# Altium PCB Patch.PcbDoc
Units mil, origin at the board's own origin, x right, y up, seen from the top; angles counter-clockwise.
Board outline 5118.11 x 5118.11 mil, 2 copper layers (Top Layer, Bottom Layer); 22 components, 7 nets, 67 pads, 5 vias.
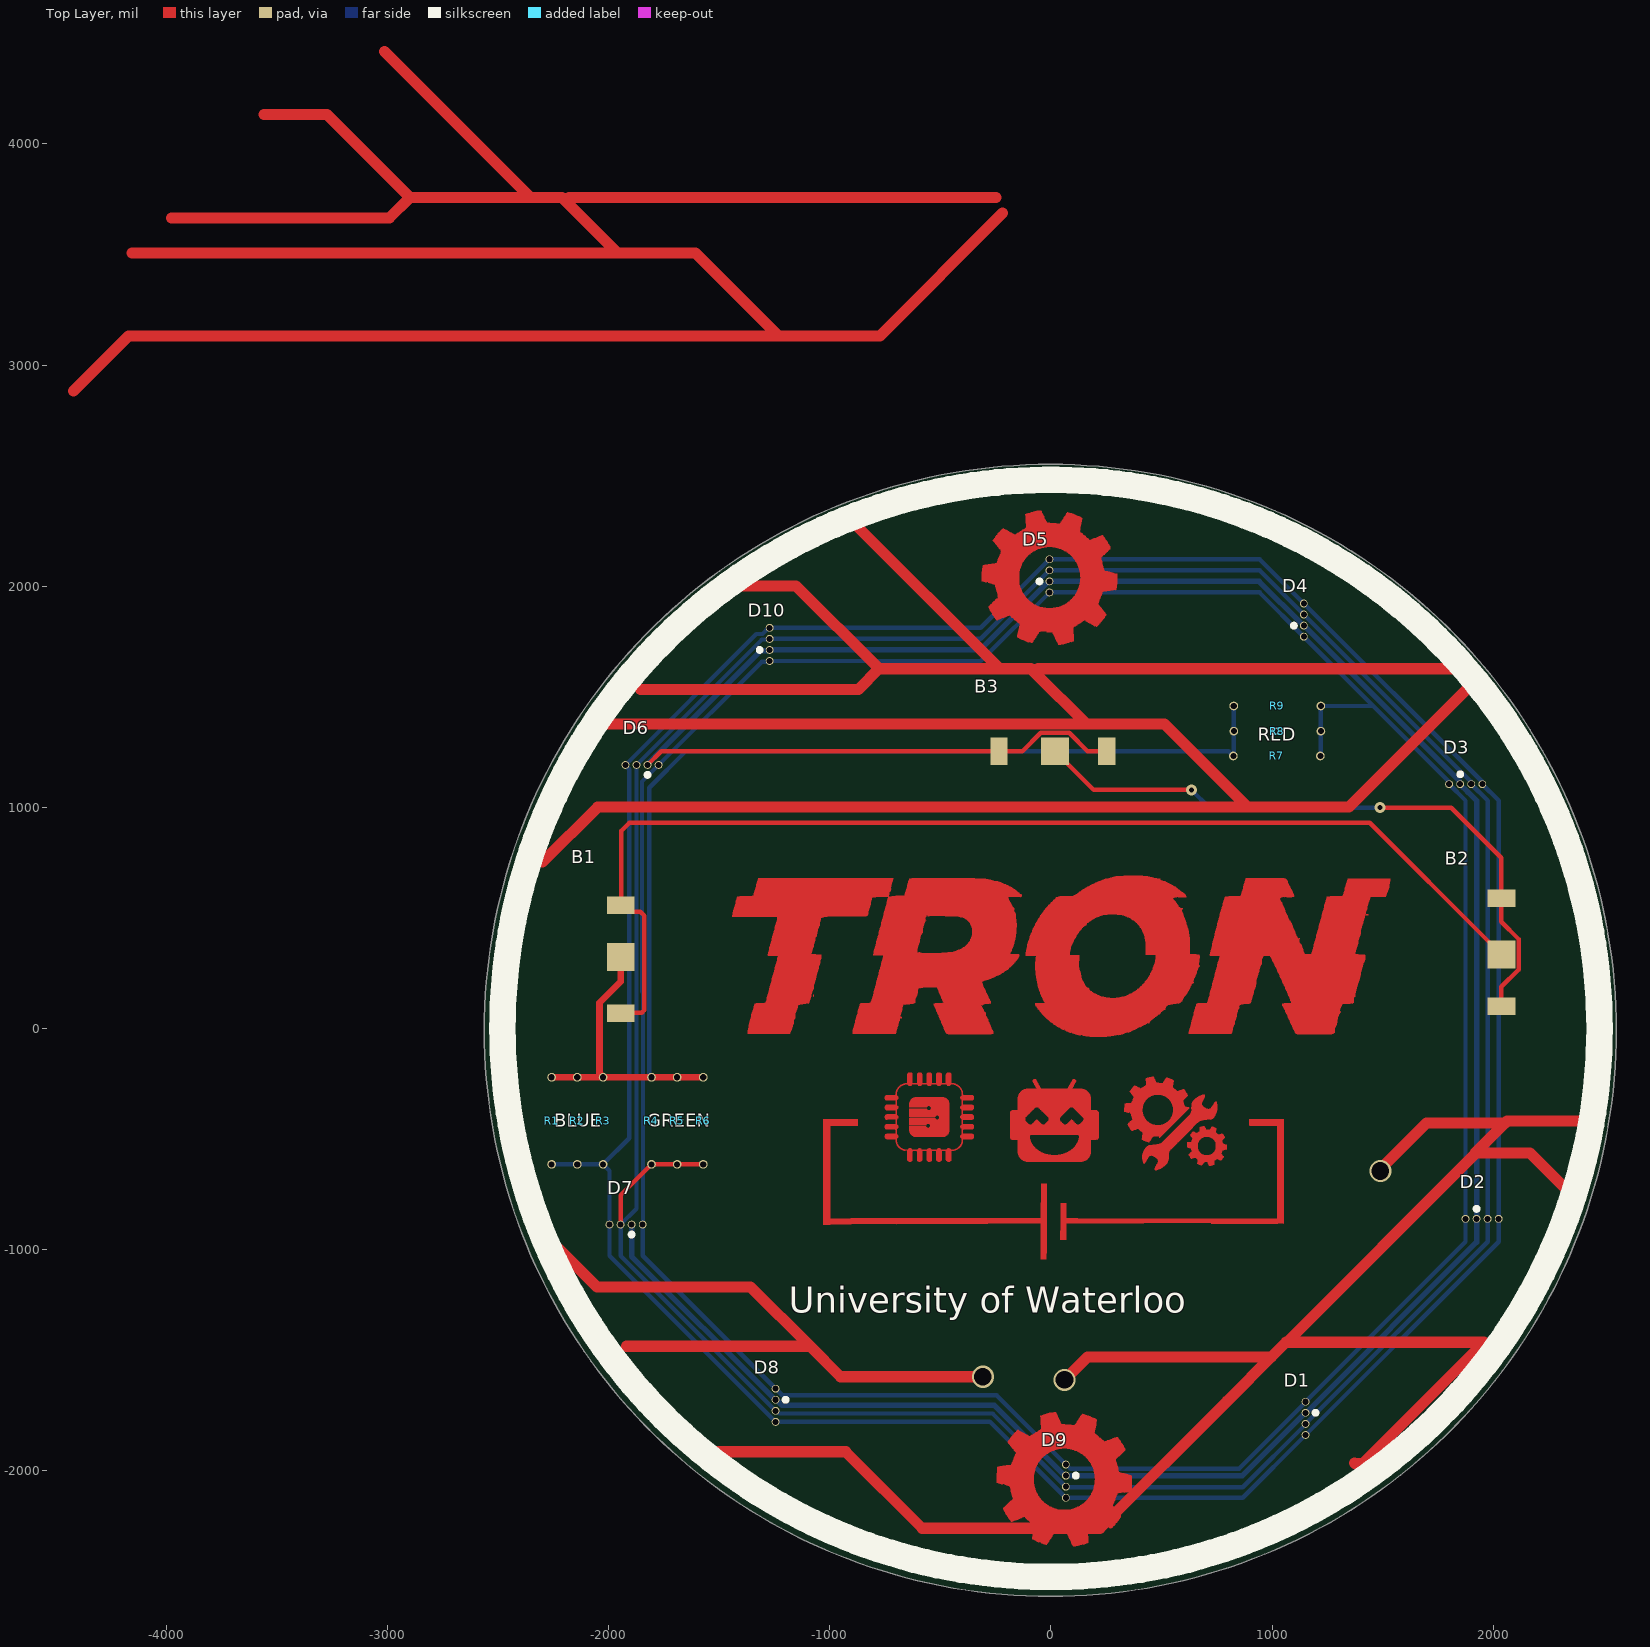
[diagram p0: Top Layer view]
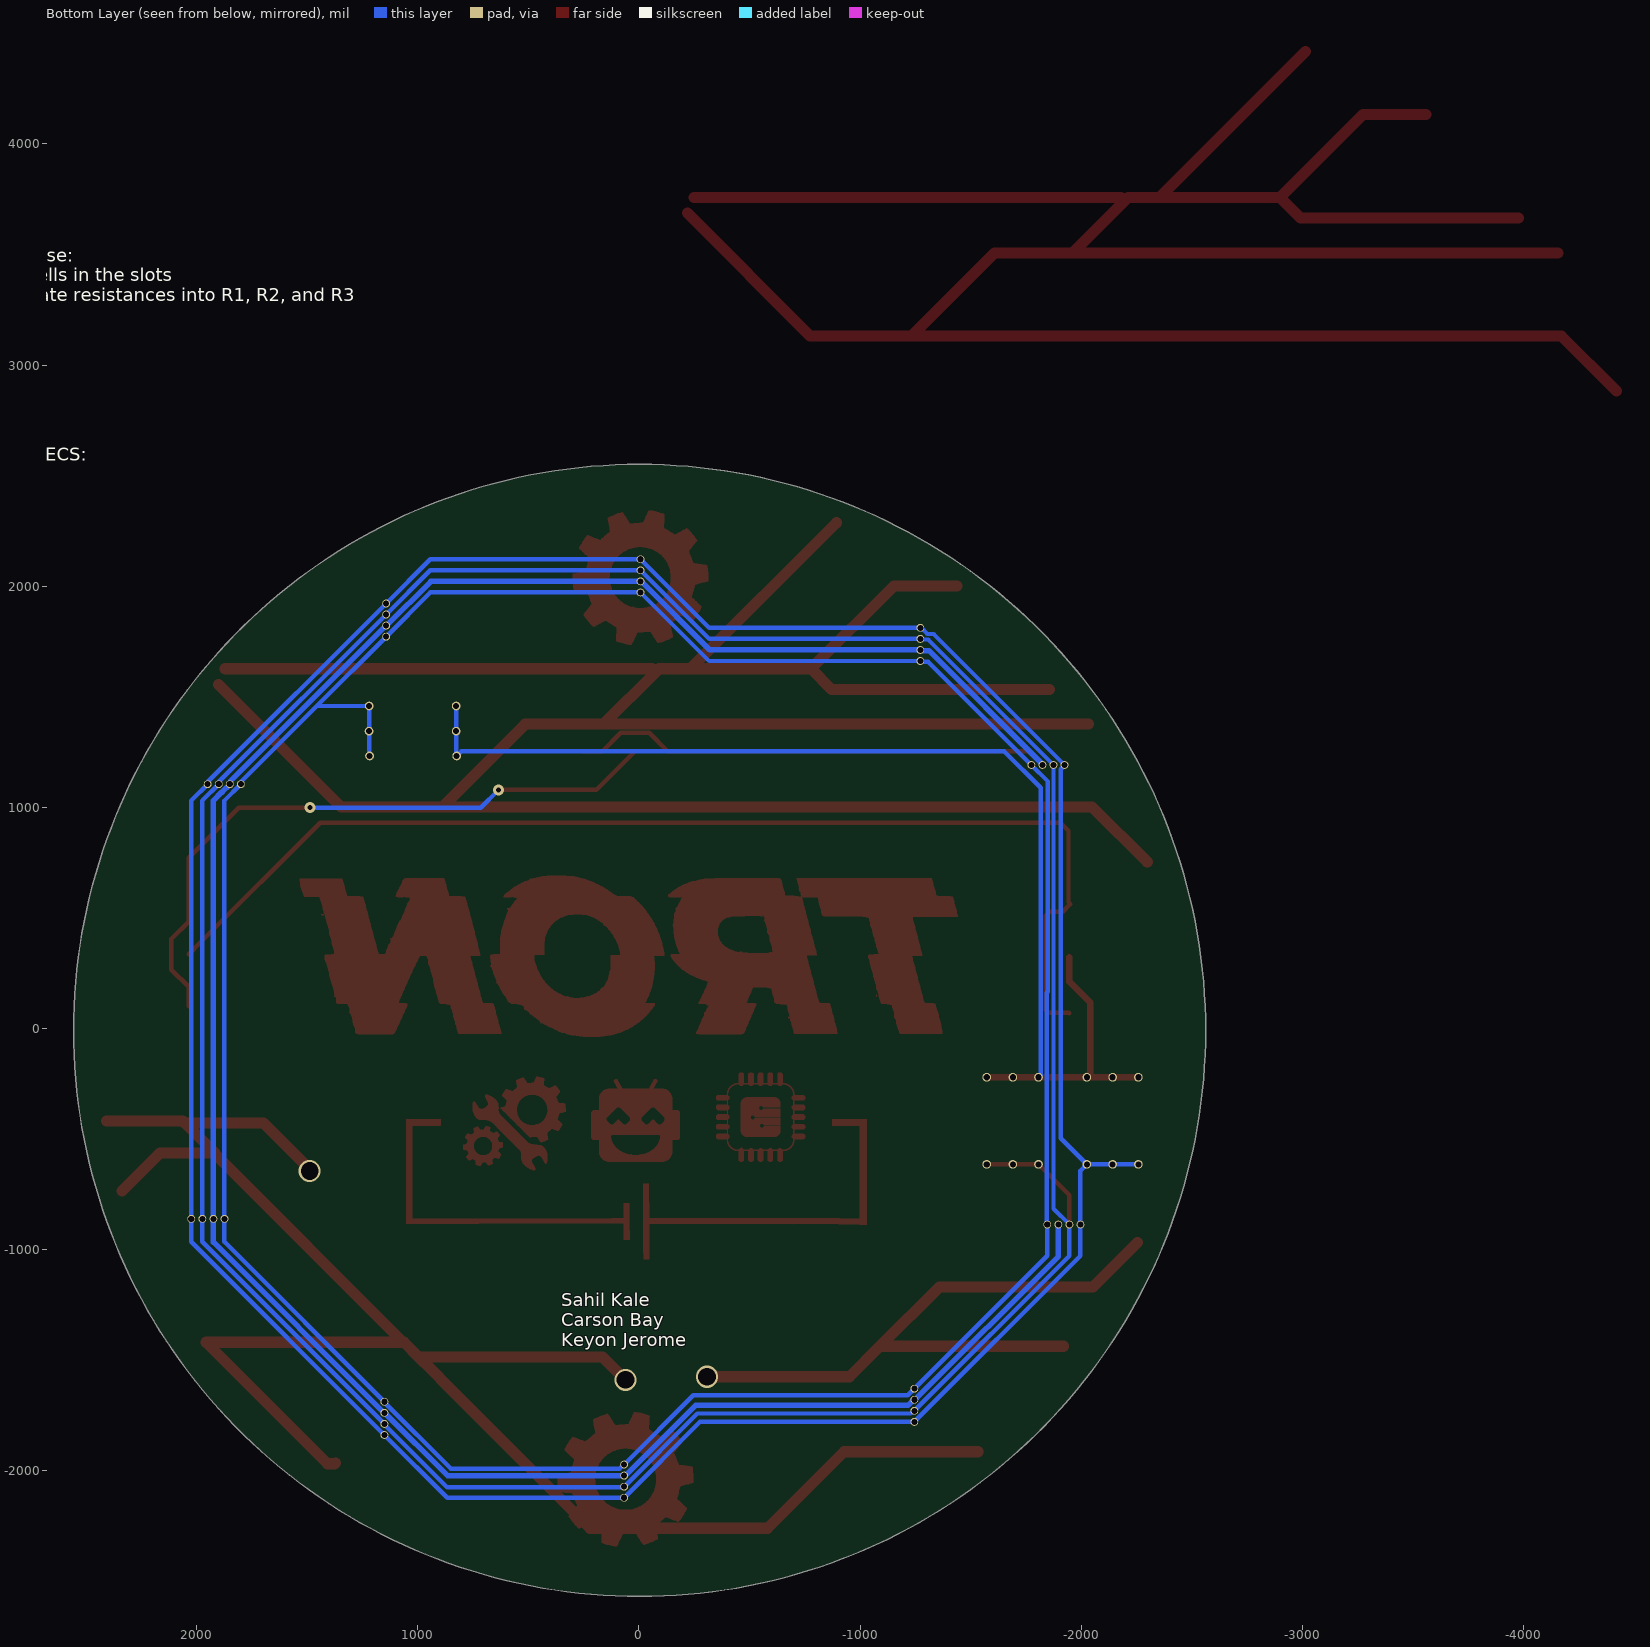
[diagram p1: Bottom Layer view, seen from below]
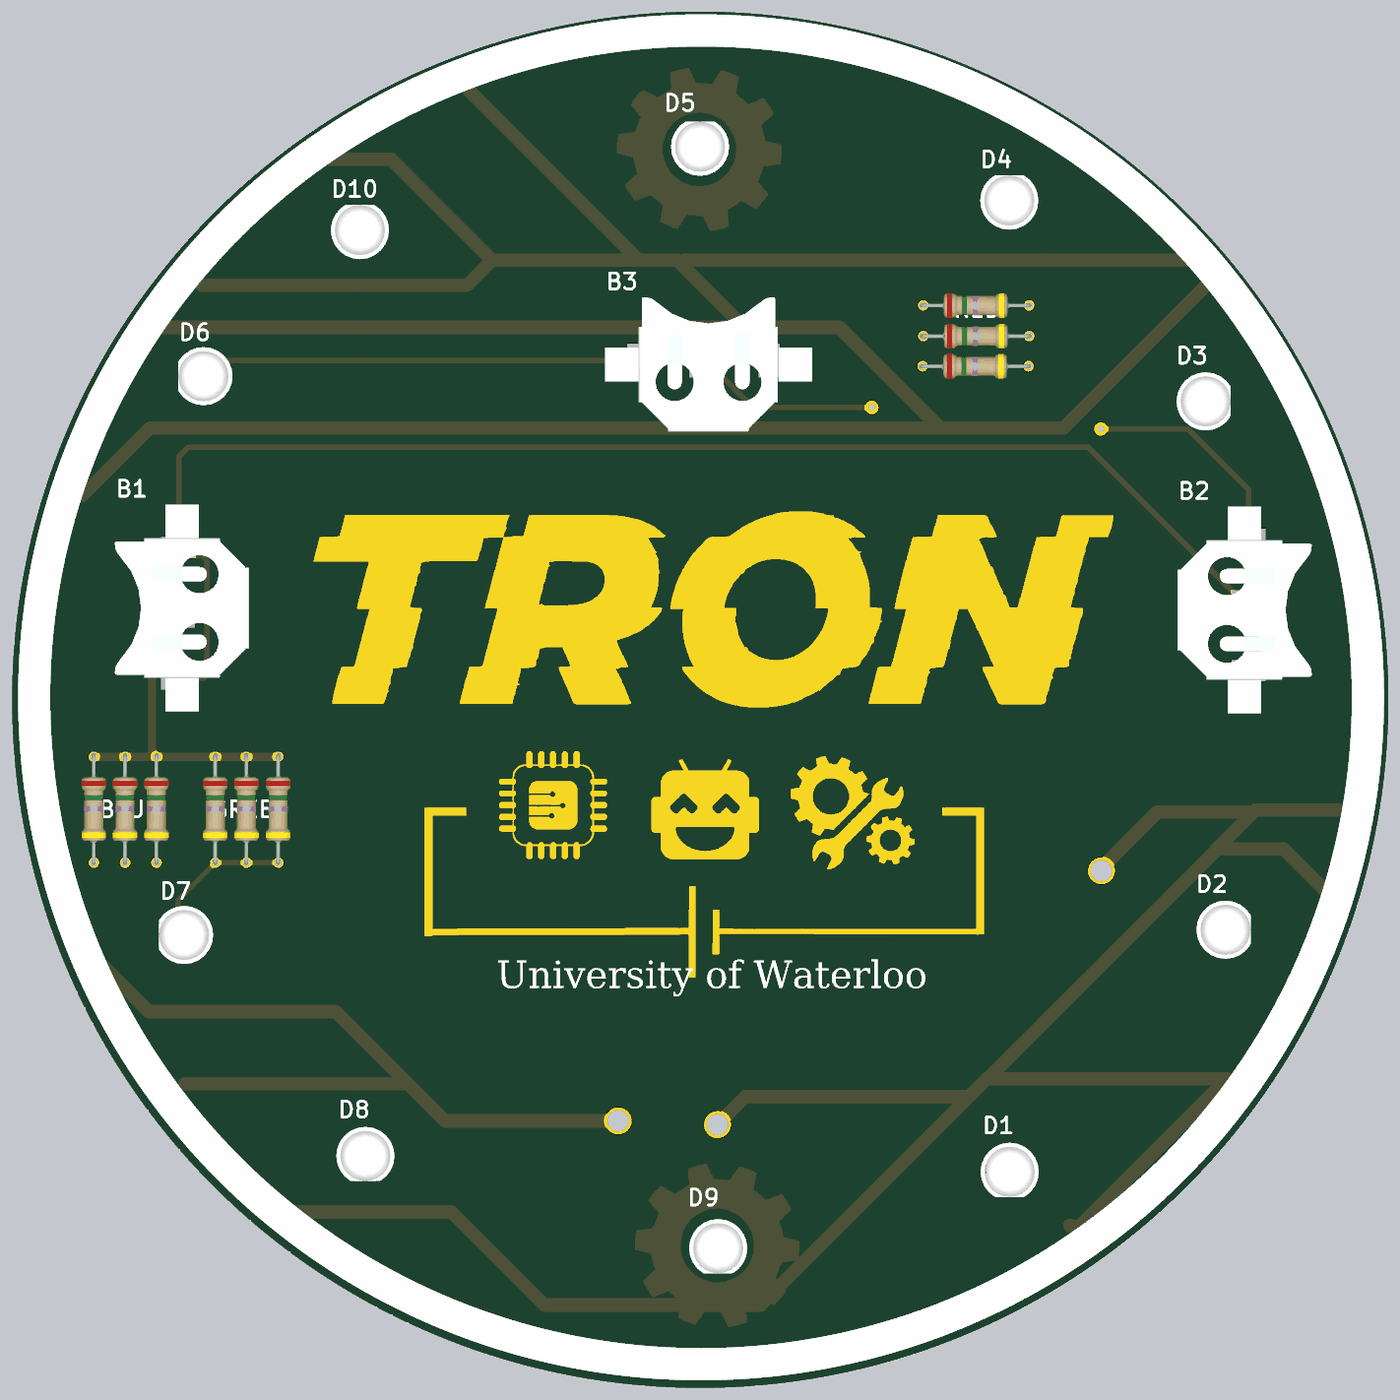
[diagram p2: 3D render of the assembled board from above, using the file's embedded part models]

## Layer stack, top to bottom
Top Solder: solder mask 0.4, Solder Resist, Dk 3.5
Top Layer: signal copper 1.4
Dielectric 1: dielectric 12.6, FR-4, Dk 4.8
Bottom Layer: signal copper 1.4
Bottom Solder: solder mask 0.4, Solder Resist, Dk 3.5

## Board outline
-2562.06,-8 ccw(c-3,-8) -3,-2567.06 ccw(c-3,-8) 2556.06,-8 ccw(c-3,-8) -3,2551.06 ccw(c-3,-8)

## Design rules (kind name [scope] priority, off if disabled: settings)
BoardOutlineClearance [All] p1: gap=7.87 ignorepadtopadclearanceinfootprint=FALSE
Clearance [All] p1: gap=5 ignorepadtopadclearanceinfootprint=FALSE except(9.84: Arc-Hole Track-Hole SMDPad-Hole THPad-Hole Via-Hole Fill-Hole Poly-Hole Region-Hole Text-Hole)
ComponentClearance [All] p1: gap=5 collisioncheckmode=3 verticalgap=5 showdistances=TRUE
DiffPairsRouting [All] p1: maxlimit=10 minlimit=5 mostfreqgap=5 toplayer_minwidth=5 toplayer_maxwidth=1000 toplayer_prefwidth=5 bottomlayer_minwidth=5 bottomlayer_maxwidth=1000 bottomlayer_prefwidth=5 maxuncoupledlength=500
Height [All] p1: minheight=0 maxheight=71497.94 prefheight=500
HoleSize [All] p1: absolutevalues=TRUE maxlimit=248.03 minlimit=11.81 maxpercent=80.000 minpercent=20.000
HoleToHoleClearance [All] p1: gap=9.84 allowstackedmicrovias=FALSE
MinimumAnnularRing [All] p1: minimumring=3
MinimumSolderMaskSliver [All] p1: minsoldermaskwidth=0
PlaneClearance [All] p1: clearance=5
PlaneConnect PlaneConnectPowerPads [InPadClass('PowerPads')] p1: planeconnectstyle=Direct reliefexpansion=20 reliefentries=4 reliefconductorwidth=10 reliefairgap=10
PlaneConnect [All] p2: pad.planeconnectstyle=Relief pad.reliefexpansion=11.81 pad.reliefentries=4 pad.reliefconductorwidth=5 pad.reliefairgap=5 via.planeconnectstyle=Direct via.reliefexpansion=11.81 via.reliefentries=4 via.reliefconductorwidth=5 via.reliefairgap=5
PolygonConnect PolygonConnectPowerPads [All vs (InPadClass('PowerPads'))] p1: connectstyle=Direct reliefconductorwidth=10 reliefentries=4 polygonreliefangle="90 Angle" airgapwidth=10
PolygonConnect [All] p2: thpad.connectstyle=Relief thpad.reliefconductorwidth=5 thpad.reliefentries=4 thpad.polygonreliefangle="90 Angle" thpad.airgapwidth=5 smdpad.connectstyle=Relief smdpad.reliefconductorwidth=5 smdpad.reliefentries=4 smdpad.polygonreliefangle="90 Angle" smdpad.airgapwidth=5 via.connectstyle=Direct via.reliefconductorwidth=5 via.reliefentries=4 via.polygonreliefangle="90 Angle" via.airgapwidth=5
RoutingVias [All] p1: holewidth=11.81 width=23.62 viastyle="Through Hole" minholewidth=11.81 minwidth=23.62 maxholewidth=23.62 maxwidth=259.84
SilkToSilkClearance [All] p1: silktosilkclearance=0
SilkToSolderMaskClearance [IsPad] p1: minsilkscreentomaskgap=5 clearancetoexposedcopper=TRUE
SolderMaskExpansion [All] p1: expansion=2.95 istentingtop=FALSE
Width [All] p1: maxlimit=1000 minlimit=5 preferedwidth=5 minimp=50.000000 maximp=50.000000 favimp=50.000000
20 further rules are at their usual default settings.

## Classes and differential pairs
component class Main: B1 B2 B3 D1 D2 D3 D4 D5 D6 D7 D8 D9 D10 R1 R4 R5 R6 R7 R8 R9

## Components (designator, comment, footprint, x,y, rotation, side; value= is the part's Value field where it differs from the comment)
B1 "7.9mm BAT" 2988 -1945,558 r270 top
B2 "7.9mm BAT" 2988 2036,100.81 r90 top
B3 "7.9mm BAT" 2988 253,1254 r180 top
D1 "Tri Colour RGB LED" RGB_LED_THRUHOLE 1151,-1687 r270 top
D2 "Tri Colour RGB LED" RGB_LED_THRUHOLE 1874,-860 r0 top
D3 "Tri Colour RGB LED" RGB_LED_THRUHOLE 1800,1105 r0 top
D4 "Tri Colour RGB LED" RGB_LED_THRUHOLE 1143,1772 r90 top
D5 "Tri Colour RGB LED" RGB_LED_THRUHOLE -7,1972 r90 top
D6 "Tri Colour RGB LED" RGB_LED_THRUHOLE -1774,1192 r180 top
D7 "Tri Colour RGB LED" RGB_LED_THRUHOLE -1846,-886 r180 top
D8 "Tri Colour RGB LED" RGB_LED_THRUHOLE -1245,-1628 r270 top
D9 "Tri Colour RGB LED" RGB_LED_THRUHOLE 67,-1971 r270 top
D10 "Tri Colour RGB LED" RGB_LED_THRUHOLE -1272,1662 r90 top
R1 "?Ω" "Generic ThroughHole" -2257.74,-220 r270 top
R2 "?Ω" "Generic ThroughHole" -2141.74,-220 r270 top
R3 "?Ω" "Generic ThroughHole" -2025,-220 r270 top
R4 "?Ω" "Generic ThroughHole" -1806.17,-220 r270 top
R5 "?Ω" "Generic ThroughHole" -1690.17,-220 r270 top
R6 "?Ω" "Generic ThroughHole" -1572.17,-220 r270 top
R7 "?Ω" "Generic ThroughHole" 824.28,1232.65 r0 top
R8 "?Ω" "Generic ThroughHole" 826.58,1344.65 r0 top
R9 "?Ω" "Generic ThroughHole" 826.28,1458.65 r0 top

## Footprints (in the part's own frame and the unit in brackets; to place one, negate y for a bottom-side part, rotate by r counter-clockwise, add the part's x,y. Pads: shape width x height; smd on the part's side, far side on the other; paste and mask are expansions set on the pad)
2988 [mm]
  rect 2x3.2 smd: 1(0,0) 1(12.4,0)
  rect 3.2x3.2 smd: 2(5.969,0)
  body extent -4.06,-5.97 15.49,6.73, height 3.17
"Generic ThroughHole" [mm]
  round 1 hole 0.7: 1(0,0) 2(10,0)
  body extent -0.3,-1.17 10.21,1.14, height 2.51
RGB_LED_THRUHOLE [mm]
  round 0.9 hole 0.7: 1(0,0) 2(2.54,0) 3(3.81,0) 4(1.27,0)
  silkscreen extent 1.07,0.94 1.47,1.34, body extent -0.81,-2.83 4.32,2.67, height 11.6

## Part data
B1 B2 B3: library part "CCELL HOLDER 7.9MM", "KEYSTONE         2988            BATTERY CONTACT, 7.9MM HEAR AID CELL, SURFACE MT", Manufacturer="Keystone Electronics", Manufacturer Part Number=2988, Supplier Part Number 1=36-2988-ND, Category="Batteries and Accessories", ComponentLink1Description=https://datasheet.ciiva.com/4642/m60p6-29374-4642672.pdf?src-supplier=Mouser, ComponentLink1URL=https://datasheet.ciiva.com/4642/m60p6-29374-4642672.pdf?src-supplier=Mouser, ComponentLink2Description=https://datasheet.ciiva.com/4/2988-4524.pdf?src-supplier=Digi-Key, ComponentLink2URL=https://datasheet.ciiva.com/4/2988-4524.pdf?src-supplier=Digi-Key, ComponentLink3Description=https://datasheet.ciiva.com/1390/1726104-1390366.pdf?src-supplier=Element14, ComponentLink3URL=https://datasheet.ciiva.com/1390/1726104-1390366.pdf?src-supplier=Element14, Pricing 1="1=0.39000, 25=0.35440, 100=0.34690, 250=0.32528, 500=0.28920 (USD)", RoHS=Yes, Stock 1=1523, Supplier 1=Digi-Key
D1 D2 D3 D4 D5 D6 D7 D8 D9 D10: library part LED_RGB_THRUHOLE, Supplier Link=https://www.amazon.com/Tricolor-Multicolor-Lighting-Electronics-Components/dp/B01C19ENDM
R1 R2 R3 R4 R5 R6 R7 R8 R9: library part "GENERIC - RES", "Generic Through Hole Resistor"

## Via types
v1: diameter 100, hole 80, Top Layer to Bottom Layer, 3 vias
v2: diameter 50, hole 23.62, Top Layer to Bottom Layer, 2 vias

## Nets (pads, with @x,y where several pads share a name; then routed paths per layer and width w, separated by ;. In a path a pad name is that pad's centre, name@x,y a point inside that pad or via, vN(x,y) a via of type N, cw(c..) or ccw(c..) an arc to the next point about the centre after c; other vN are vias at no path point)
4V5: B1.2 R1.1 R2.1 R3.1 R4.1 R5.1 R6.1 R7.1 R8.1 R9.1 | length 5531.8
  Top Layer w30: R1.1 R2.1 R3.1 ; B1.2 -1945,213 -2041,117 -2041,-201.46 -2025,-217.46 R3.1 ; R6.1 R5.1 R4.1 R3.1
  Bottom Layer w20: R4.1 -1816,-210.17 -1816,1089 -1652,1253 802.88,1253 823.23,1232.65 R7.1 825.43,1233.8 825.43,1343.5 R8.1 826.43,1344.8 826.43,1458.5 R9.1
BLUE: D1.3 D2.3 D3.3 D4.3 D5.3 D6.3 D7.3 D8.3 D9.3 D10.3 R1.2 R2.2 R3.2 | length 14258.1
  Bottom Layer w20: R1.2 R2.2 R3.2 ; R3.2 -1996,-642.7 -1996,-1027 D8.3 -276,-1778 D9.3 867,-2121 D1.3 2024,-964 D2.3 2024,1031 D3.3 1947.05,1107.95 1947.05,1117.95 D4.3 943,2122 D5.3 -317,1812 D10.3 -1276.18,1812 -1304.13,1784.05 -1331.95,1784.05 D6.3 -1924,1189.57 -1907,1172.57 -1907,-495.7 R3.2
GND: B3.1 D1.4 D2.4 D3.4 D4.4 D5.4 D6.4 D7.4 D8.4 D9.4 D10.4 | length 13487.8
  Top Layer w20: D6.4 -1762,1254 -235.19,1254 -129.2,1254 -46.2,1337 82.2,1337 165.2,1254 B3.1@253,1254
  Bottom Layer w25: D7.4 -1896,-1030 -1253.22,-1672.78 -1253.04,-1672.78 -1247.82,-1678 -1240.82,-1678 -1215.82,-1703 -256,-1703 56.78,-2015.78 58.96,-2015.78 64.18,-2021 865.27,-2021 1149.27,-1737 1152.08,-1737 1924,-965.08 D2.4 1924,814.97 1924,1031 1886.12,1068.88 1885.04,1068.88 1850,1103.92 D3.4 ; D6.4 -1824,1194.82 -1818.78,1200.04 -1818.78,1201.37 -1311.1,1709.05 -1306.95,1709.05 -1274.95,1709.05 D10.4 -320,1712 -15.22,2016.78 -15.04,2016.78 -9.82,2022 941,2022 1141,1822 1144.08,1822 1844.78,1121.3 1844.78,1113.04 1848,1109.82 1848,1108.91 D3.4@1847.05,1107.95
GREEN: D1.2 D2.2 D3.2 D4.2 D5.2 D6.2 D7.2 D8.2 D9.2 D10.2 R4.2 R5.2 R6.2 | length 14275.2
  Top Layer w20: D7.2 -1946,-753.53 R4.2 R5.2 R6.2
  Bottom Layer w20: D7.2@-1948.5,-883.5 D7.2 ; D7.2 -1946,-1027 D8.2 -1240.82,-1728 -1228.82,-1740 -264,-1740 69,-2073 867.45,-2073 1151,-1789.45 D1.2 1974,-964 D2.2 1974,1031 D3.2 1897.05,1107.95 1897.05,1117.95 D4.2 943,2072 D5.2 -317,1762 D10.2 -1274.95,1759.05 -1306.95,1759.05 D6.2 -1874,-814 D7.2
NetB1_1: B1.1 B2.2 | length 5247.7
  Top Layer w20: B1.1@-1945,69.81 -1942.81,72 -1849.72,72 -1838,83.72 -1838,510 -1856.63,528.63 -1915.63,528.63 -1950,563 -1942,571 -1942,894.88 -1905.88,931 1440.81,931 1983.01,388.8 B2.2
NetB2_1: B2.1 B3.2 | length 2954
  Top Layer w20: B3.2 193,1079 v2(635,1079) ; v2(1487,999) 1809.98,999 2036,772.98 2036,589 2036,483.01 2113.99,405.02 2113.99,266.61 2036,188.61 B2.1@2036,100.81
  Bottom Layer w20: v2(635,1079) 715,999 v2(1487,999)
RED: D1.1 D2.1 D3.1 D4.1 D5.1 D6.1 D7.1 D8.1 D9.1 D10.1 R7.2 R8.2 R9.2 | length 13622.2
  Bottom Layer w20: R7.2 1219.13,1233.8 1219.13,1343.5 R8.2 1220.13,1344.8 1220.13,1458.5 R9.2 1456.35,1458.65 ; 1456.35,1458.65 1797.05,1117.95 1797.05,1107.95 D3.1 1874,1031 1874,-964 D1.1 1151,-1689.45 851.45,-1989 86.43,-1989 68.43,-1971 D9.1 -246,-1658 -1215,-1658 -1846,-1027 D7.1 -1844.52,-884.52 -1844.52,161.2 -1849,165.68 -1849,1062.36 -1849,1117 D6.1 -1306.95,1659.05 -1274.95,1659.05 D10.1 -317,1662 D5.1 943,1972 D4.1 1456.35,1458.65
copper on no net: | length 38604.7
  Top Layer w50: -4418.84,2883.01 -4169.76,3132.09 -1413.76,3132.09 -1231.76,3132.09 ; -4153.76,3507.09 -1960.76,3507.09 ; -3976.76,3664.09 -2991.76,3664.09 -2898.76,3757.09 ; -3558.76,4132.09 -3273.76,4132.09 -2898.76,3757.09 ; -3013.76,4417.09 -2353.76,3757.09 ; -2298.08,752.92 -2049,1002 707,1002 889,1002 ; -2253.23,-967.77 -2053,-1168 -1358,-1168 -1090,-1436 ; -2178.76,3757.09 -248.76,3757.09 ; -2033,1377 160,1377 ; -1919.44,-1436 -1090,-1436 ; -1856,1534 -871,1534 -778,1627 ; -1533,-1913 -928,-1913 -582,-2259 221,-2259 797,-1683 865,-1615 936,-1544 995.84,-1484.16 ; -1438,2002 -1153,2002 -778,1627 ; -893,2287 -233,1627 ; v1(-308,-1574) -952,-1574 -1090,-1436 ; -219.47,3686.38 -773.76,3132.09 -1231.76,3132.09 ; -58,1627 1872,1627 ; v1(61,-1588) 164.84,-1484.16 995.84,-1484.16 ; 1066,-1418 1921,-563 ; 1372,-1963 1376.29,-1967.29 1407.71,-1967.29 1957,-1418 1062,-1418 995.84,-1484.16 ; v1(1489,-644) 1489,-634 1697,-426 2054,-426 ; 1901.29,1556.29 1347,1002 889,1002 ; 2337.97,-734.97 2166,-563 1917,-563 2062,-418 2407,-418 ; -2898.76,3757.09 -2353.76,3757.09 ; -2353.76,3757.09 -2226.54,3757.09 -2210.76,3757.09 -2194.76,3741.09 -1960.76,3507.09 ; -1960.76,3507.09 -1606.76,3507.09 -1231.76,3132.09 ; -778,1627 -233,1627 ; -233,1627 -105.78,1627 -90,1627 -74,1611 160,1377 ; 160,1377 514,1377 889,1002

## Other copper
Top Layer:
  drawing of 16 lines, arcs and shapes, not listed

## Silkscreen, mask and mechanical layers (free items; w line width, h text height)
Top Overlay:
  circle w120: c0,1 r2480
  text "RED" at 935,1301 h60
  text "BLUE" at -2246,-444 h60
  text "GREEN" at -1826,-444 h60
  text "University of Waterloo" at -1185.77,-1323 h200
Bottom Overlay:
  text "Instructions for use: / - Insert button cells in the slots / - Insert appropriate resistances into R1, R2, and R3 /  / LED Information: / R1: Blue (3.0v) / R2: Green (3.0v) / R3: Red (2.0v) / 15mA MAX /  / BUTTON CELL SPECS: / - 7.9mm | 1.5V" at 3376,2478 h60
  text "Sahil Kale / Carson Bay / Keyon Jerome" at 352,-1435 h60
Top Solder:
  drawing of 11 lines, arcs and shapes, not listed